# EAGLE board arm_4inProp (EAGLE 5.10)
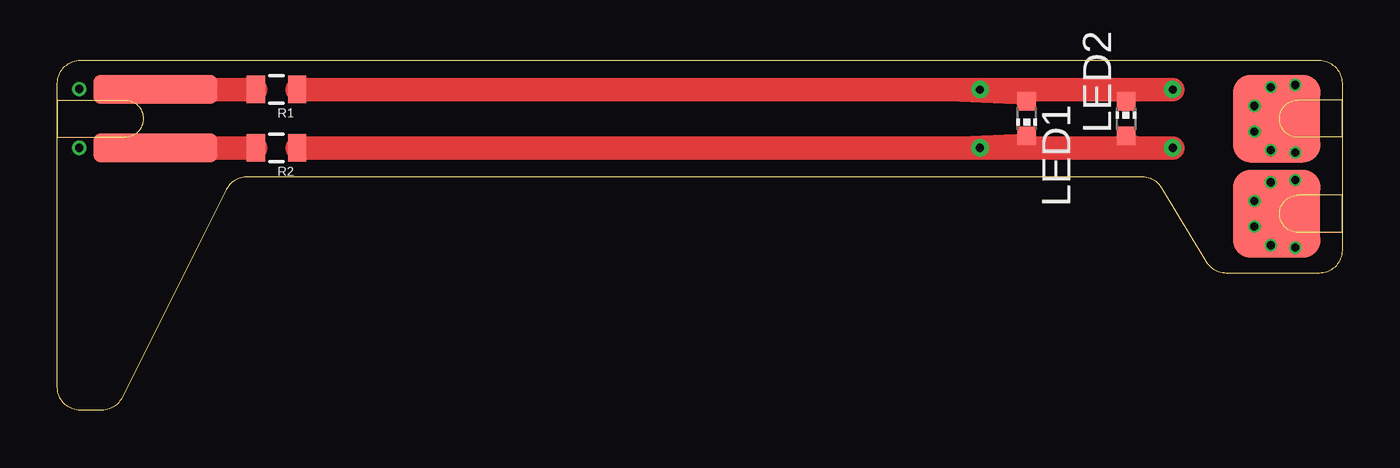
[diagram p0: board, top side]
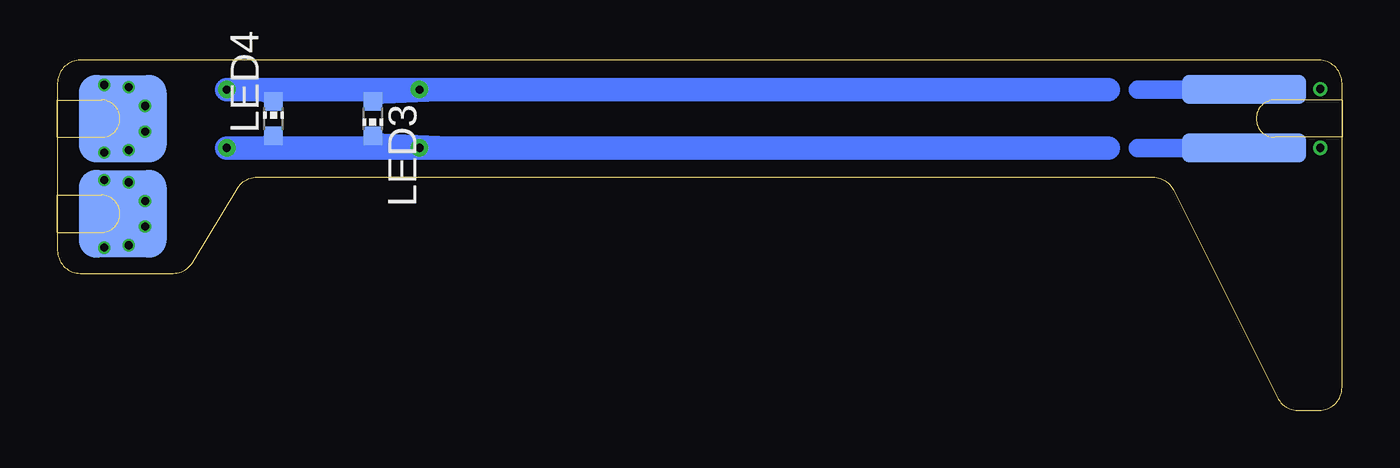
[diagram p1: board, bottom side, seen from below]

Size 55.88 x 15.24 mm. Coordinates in mm from the lower left corner, seen from the top.
Outline: 2.81,0.57 arc-65 1.91,0 1,0 arc-90 0,1 0,14.24 arc-90 1,15.24 54.88,15.24 arc-90 55.88,14.24 55.88,6.97 arc-90 54.88,5.97 50.85,5.97 arc-59 50,6.45 48.04,9.68 arc59 47.19,10.16 8.24,10.16 arc63 7.34,9.61 2.81,0.57
Copper layers (1*16): Top 0.0356mm / dielectric 1.5011mm / Bottom 0.0356mm
Design rules "SilverCircuits-tented": minimum track width 7mil, minimum drill 14mil, track to track 7mil, track to pad 7mil, pad to pad 7mil, via to via 7mil, smd to smd 0mil, copper to edge 20mil, drill to drill 8mil, minimum pad ring 0mil, minimum via ring 8mil, stop-mask expansion 4mil, vias tented up to drill 14mil, thermal gap 10mil

## Footprints (pad centres in the part's own frame; a part is rotated, then mirrored left to right if it is on the bottom)
CHIP-LED0603 = smd 0.8 x 0.8: A 0,-0.75; C 0,0.75
0805 = smd 0.8 x 1.2: 1 -0.9,0; 2 0.9,0
SLOT = smd 5.385 x 1.27: P$1 4.267,1.27; P$2 4.267,-1.27 | smd 5.385 x 1.27 bottom: P$3 4.267,1.27; P$4 4.267,-1.27 | drill 0.356 pad 0.61 round: P$5 0.94,1.295; P$6 0.94,-1.27
SLOT_SM = smd 3.81 x 3.81 bottom: K 2.845,0 | drill 0.356 round: N 2.032,1.473; O 3.099,1.372; P 3.81,0.559; R 2.032,-1.473; S 3.099,-1.372; T 3.81,-0.559 | smd 3.81 x 3.81: P$1 2.845,0

## Placement (x,y rotation side)
LED1  [CHIP-LED0603]  42.16,12.7 180 top
LED2  [CHIP-LED0603]  46.48,12.7 0 top
LED3  [CHIP-LED0603]  42.16,12.7 180 bottom
LED4  [CHIP-LED0603]  46.48,12.7 0 bottom
R1  [0805]  9.53,13.97 180 top
R2  [0805]  9.53,11.43 180 top
U$1  SLOT  [SLOT]  0,12.7 0 top
U$2  SLOT_SM  [SLOT_SM]  55.88,12.7 180 top
U$3  SLOT_SM  [SLOT_SM]  55.88,8.56 180 top

## Library data of the parts
LED1-LED4 = led
R1 R2 = SparkFun
U$1 = NSL_MiniQuad
U$2 U$3 = arm_4inProp

## Nets
N$1: LED1.A LED2.C LED3.A LED4.C R1.1
N$4: LED1.C LED2.A LED3.C LED4.A R2.1
N$7: R1.2 U$1.P$1
N$8: R2.2 U$1.P$2

## Tracks (layer width: path | path; a pad name or v marks a point on that pad's centre or on a via)
N$1  (via drill 0.36)
  Top 0.254: LED1.A 30.48,13.97 v40.13,13.97 v48.51,13.97 LED2.C
  Top 1.016: R1.1 v48.51,13.97
  Bottom 0.254: LED1.A 30.48,13.97 v40.13,13.97 v48.51,13.97 LED2.C
  Bottom 1.016: v48.51,13.97 10.16,13.97
N$2
  Bottom 0.813: 2.54,13.97 8.89,13.97
N$3
  Bottom 0.813: 2.54,11.43 8.89,11.43
N$4  (via drill 0.36)
  Top 0.254: LED1.C 30.48,11.43 v40.13,11.43 v48.51,11.43 LED2.A
  Top 1.016: R2.1 v48.51,11.43
  Bottom 0.254: v48.51,11.43 LED2.A | v40.13,11.43 30.48,11.43 LED1.C
  Bottom 1.016: 10.16,11.43 v40.13,11.43 v48.51,11.43
N$7
  Top 1.016: U$1.P$1 R1.2
N$8
  Top 1.016: U$1.P$2 R2.2